# Altium PCB PCB1.PcbDoc (part 2 of 4)
Units mm, origin at the board's own origin, x right, y up, seen from the top; angles counter-clockwise.
Board outline 152.65 x 113.28 mm, 2 copper layers (Top Layer, Bottom Layer); 145 components, 136 nets, 617 pads, 371 vias.
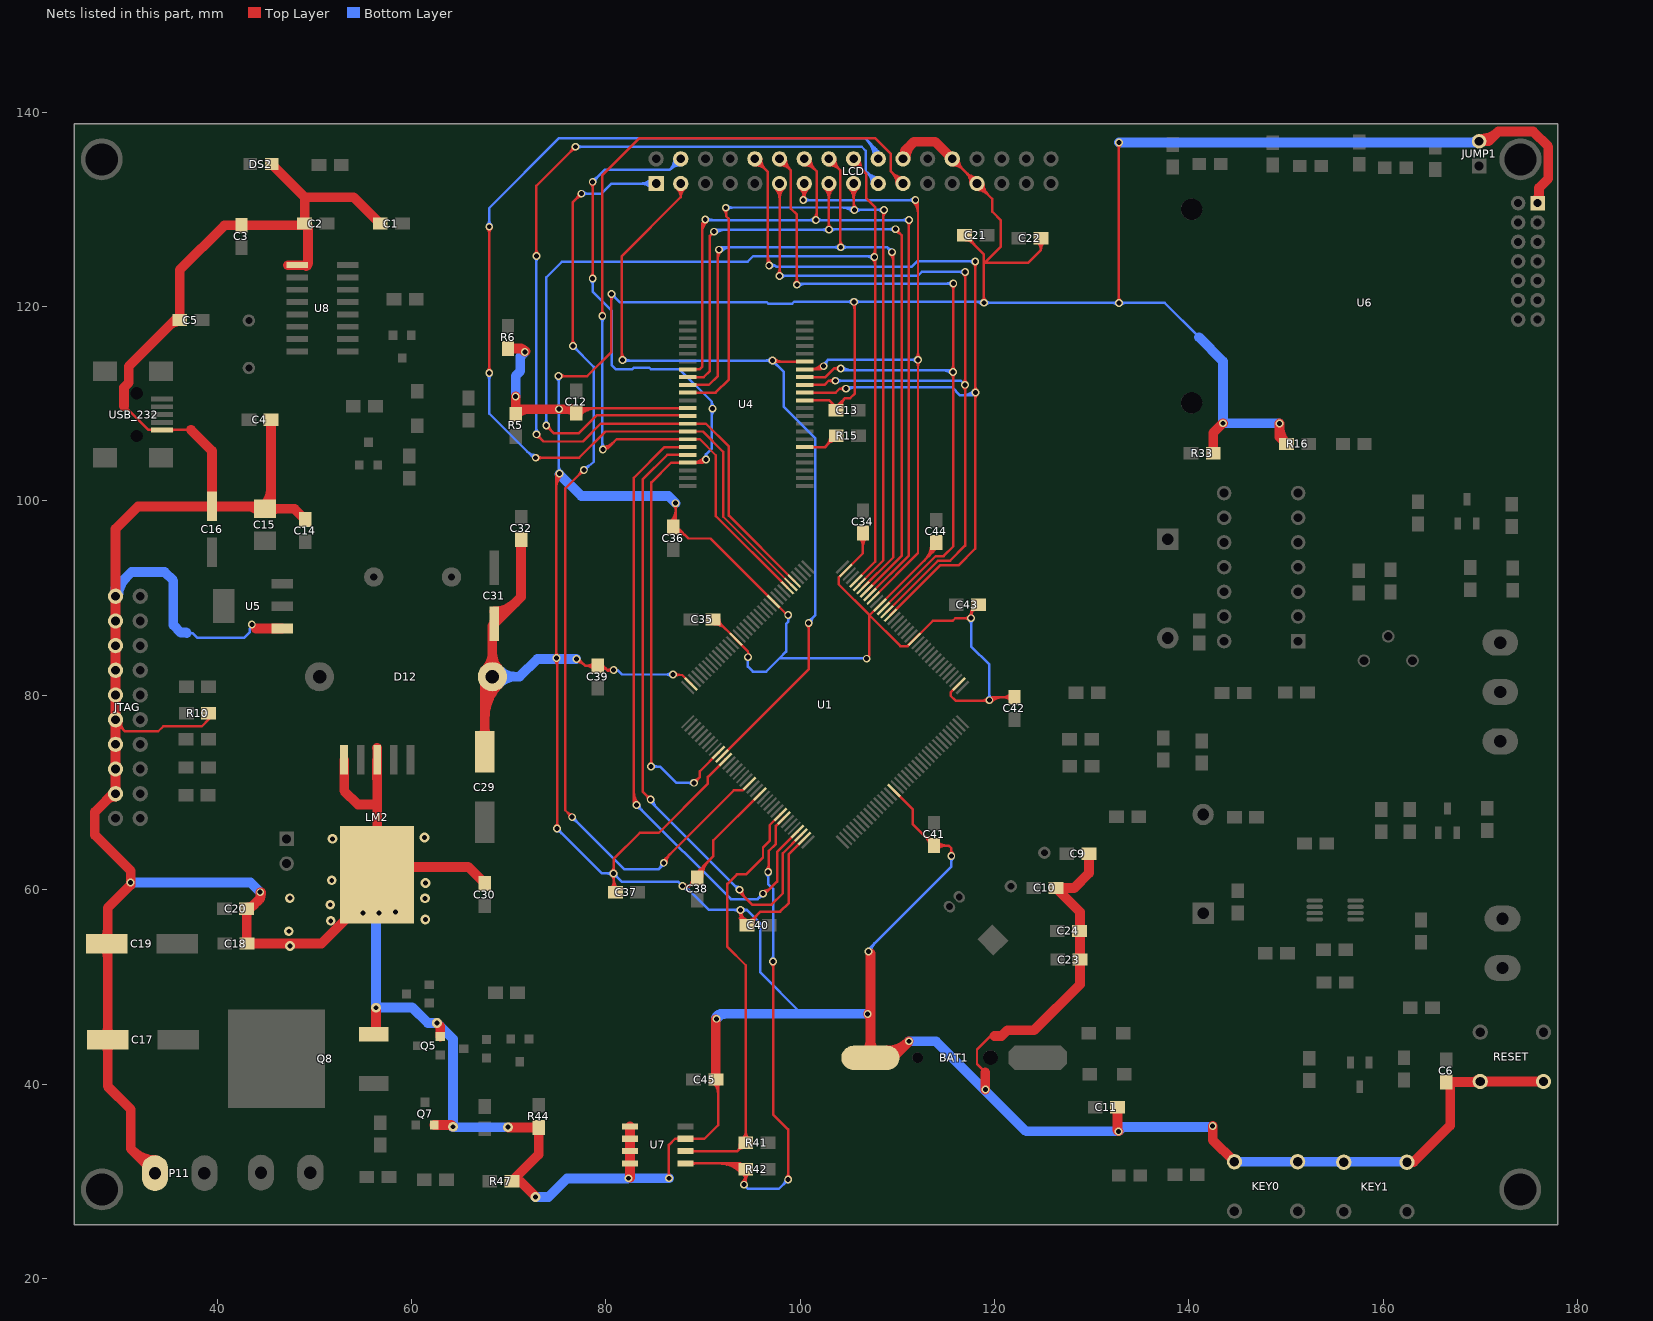
[diagram p2: the nets of this part, all layers, seen from the top]

## Via types
v1: diameter 0.8, hole 0.508, Top Layer to Bottom Layer, 296 vias
v2: diameter 1, hole 0.5, Top Layer to Bottom Layer, 75 vias

## Nets (pads, with @x,y where several pads share a name; then routed paths per layer and width w, separated by ;. In a path a pad name is that pad's centre, name@x,y a point inside that pad or via, vN(x,y) a via of type N, cw(c..) or ccw(c..) an arc to the next point about the centre after c; other vN are vias at no path point) (continued)
"FSMC D4": LCD.10 U1.58 U4.13 | length 107.1
  Top Layer w0.254: LCD.10@95.326,134.544 cw(c95.326,132.949) 96.454,134.077 cw(c97.581,135.204) LCD.10@95.987,135.204 ; LCD.10@95.326,134.798 cw(c95.326,133.817) 96.02,134.51 cw(c96.714,135.204) LCD.10@95.733,135.204 ; LCD.10@95.326,135.204 96.672,133.858 96.672,124.358 v1(96.799,124.231) ; 96.672,125.197 ccw(c97.765,125.197) v1@96.992,124.424 ; U4.13@100.441,111.149 103.656,111.149 104.064,111.557 ; v1@104.501,111.369 ccw(c104.064,110.955) 104.064,111.557 ; v1@104.501,111.745 cw(c104.064,112.159) 104.064,111.557 ; v1(104.699,111.557) 104.064,111.557 ; U1.58@109.273,88.25 114.394,93.37 116.281,93.37 118.008,95.098 v1(118.008,124.638) ; v1@117.815,124.445 cw(c117.349,123.979) 118.008,123.979 cw(c118.667,123.979) v1@118.201,124.445 ; v1@117.841,110.983 cw(c117.436,110.578) 118.008,110.578 ; v1@117.841,111.369 ccw(c117.436,111.774) 118.008,111.774 ; 118.008,110.455 cw(c118.754,110.455) v1@118.227,110.983 ; 118.008,111.896 ccw(c118.754,111.896) v1@118.227,111.369
  Bottom Layer w0.254: v1(96.799,124.231) 97.409,124.231 ; v1@97.003,124.05 cw(c97.409,123.687) 97.409,124.231 ; v1@97.003,124.413 ccw(c97.409,124.775) 97.409,124.231 ; v1(104.699,111.557) 104.851,111.709 115.595,111.709 116.434,110.871 117.729,110.871 v1(118.034,111.176) v1@118.007,111.149 ; v1@104.712,111.543 cw(c105.113,111.143) 105.113,111.709 ; v1@104.892,111.364 cw(c105.726,110.53) 105.726,111.709 ; 116.639,110.871 ccw(c116.639,112.571) v1@117.841,111.369 ; 117.227,124.689 cw(c117.227,123.856) v1@117.815,124.445 ; 117.252,110.871 ccw(c117.252,111.958) v1@118.02,111.189 ; 117.472,124.689 ccw(c117.472,125.174) v1@117.815,124.831 ; v1(118.008,124.638) 117.958,124.689 112.065,124.689 111.455,124.079 97.561,124.079 97.409,124.231
"FSMC D5": LCD.11 U1.59 U4.14 | length 96.9
  Top Layer w0.254: LCD.11@97.399,132.197 cw(c96.272,131.07) 97.866,131.07 cw(c99.461,131.07) LCD.11@98.333,132.197 ; LCD.11@97.579,132.377 cw(c96.885,131.683) 97.866,131.683 cw(c98.847,131.683) LCD.11@98.154,132.377 ; v1@97.673,123.358 ccw(c97.207,123.824) 97.866,123.824 ccw(c98.525,123.824) v1@98.059,123.358 ; v1@97.866,123.215 LCD.11@97.866,132.664 ; U4.14@100.441,111.949 102.504,111.949 102.925,112.37 v1(103.607,112.37) ; v1@103.414,112.177 ccw(c102.948,111.711) 102.948,112.37 ccw(c102.948,113.029) v1@103.414,112.563 ; U1.59@108.92,88.604 114.169,93.853 115.418,93.853 116.967,95.402 v1(116.967,123.571) ; v1@116.759,111.756 cw(c116.258,111.254) 116.967,111.254 ; v1@116.759,112.142 ccw(c116.258,112.643) 116.967,112.643 ; v1@116.774,123.378 cw(c116.308,122.912) 116.967,122.912 cw(c117.626,122.912) v1@117.16,123.378 ; 116.967,111.325 cw(c117.576,111.325) v1@117.145,111.756 ; 116.967,112.573 ccw(c117.576,112.573) v1@117.145,112.142
  Bottom Layer w0.254: v1(97.866,123.165) 112.09,123.165 112.497,123.571 v1(116.967,123.571) ; v1@98.059,122.972 cw(c98.525,122.506) 98.525,123.165 cw(c98.525,123.824) v1@98.059,123.358 ; v1(103.607,112.37) 116.531,112.37 v1(116.952,111.949) ; v1@103.8,112.177 cw(c104.266,111.711) 104.266,112.37 cw(c104.266,113.029) v1@103.8,112.563 ; v1@116.774,123.378 ccw(c116.308,122.912) 116.308,123.571 ccw(c116.308,124.23) v1@116.774,123.764
"FSMC D6": LCD.12 U1.60 U4.15 | length 96.6
  Top Layer w0.254: LCD.12@97.866,134.544 cw(c97.866,132.949) 98.994,134.077 cw(c100.121,135.204) LCD.12@98.527,135.204 ; LCD.12@97.866,134.798 cw(c97.866,133.817) 98.56,134.51 cw(c99.254,135.204) LCD.12@98.273,135.204 ; LCD.12@97.866,135.204 99.035,134.036 99.035,130.073 99.644,129.464 v1(99.644,122.25) ; v1@99.451,122.443 ccw(c98.985,122.909) 99.644,122.909 ccw(c100.303,122.909) v1@99.837,122.443 ; U4.15@100.441,112.749 102.589,112.749 103.48,113.64 v1(104.165,113.64) ; v1@103.972,113.447 ccw(c103.506,112.981) 103.506,113.64 ccw(c103.506,114.299) v1@103.972,113.833 ; U1.60@108.566,88.957 113.945,94.336 114.757,94.336 115.748,95.326 v1@115.748,122.352 ; v1@115.529,113.091 cw(c115.002,112.564) 115.748,112.564 ; v1@115.529,113.477 ccw(c115.002,114.004) 115.748,114.004 ; v1@115.555,122.184 cw(c115.089,121.718) 115.748,121.718 cw(c116.407,121.718) v1@115.941,122.184 ; 115.748,112.686 cw(c116.32,112.686) v1@115.915,113.091 ; 115.748,113.882 ccw(c116.32,113.882) v1@115.915,113.477
  Bottom Layer w0.254: v1@99.644,122.377 v1(115.748,122.377) ; v1@99.837,122.057 cw(c100.61,121.285) 100.61,122.377 ; v1(104.165,113.64) 104.343,113.462 115.545,113.462 v1(115.722,113.284) v1@115.748,113.309 ; v1@104.179,113.653 ccw(c104.641,114.115) 104.641,113.462 ; v1@104.358,113.833 ccw(c105.254,114.728) 105.254,113.462 ; 114.634,113.462 cw(c114.634,112.196) v1@115.529,113.091 ; 115.247,113.462 cw(c115.247,112.809) v1@115.709,113.271 ; v1@115.555,122.184 ccw(c115.089,121.718) 115.089,122.377 ccw(c115.089,123.036) v1@115.555,122.57
"FSMC D7": LCD.13 U1.63 U4.16 | length 83.4
  Top Layer w0.254: LCD.13@99.939,132.197 cw(c98.812,131.07) 100.406,131.07 cw(c102.001,131.07) LCD.13@100.873,132.197 ; v1@100.112,131.155 ccw(c99.4,131.867) 100.406,131.867 ; LCD.13@100.119,132.377 cw(c99.425,131.683) 100.406,131.683 cw(c101.387,131.683) LCD.13@100.694,132.377 ; v1@100.406,131.064 LCD.13@100.406,132.664 ; 100.406,131.376 ccw(c100.718,131.376) v1@100.498,131.155 ; U4.16@100.441,113.549 102.093,113.549 102.387,113.843 102.387,114.071 102.413,114.046 v1(102.413,113.868) ; U4.16@100.982,113.549 ccw(c100.982,115.299) v1@102.22,114.061 ; 101.595,113.549 ccw(c101.595,114.686) v1@102.399,113.882 ; U1.63@107.506,90.018 112.116,94.628 v1@112.116,130.683 ; v1@111.643,130.769 cw(c110.503,129.629) 112.116,129.629 ; v1@111.823,130.949 cw(c111.116,130.242) 112.116,130.242 ; v1@111.923,114.336 cw(c111.457,113.87) 112.116,113.87 cw(c112.775,113.87) v1@112.309,114.336 ; v1@111.923,114.722 ccw(c111.457,115.188) 112.116,115.188 ccw(c112.775,115.188) v1@112.309,114.722
  Bottom Layer w0.254: v1(100.305,130.962) v1(111.836,130.962) ; v1@100.498,130.769 cw(c100.964,130.303) 100.964,130.962 cw(c100.964,131.621) v1@100.498,131.155 ; v1@102.387,114.071 102.832,114.516 ; v1@102.677,113.938 cw(c103.257,114.092) 102.832,114.516 ; 111.427,114.516 ccw(c111.427,115.217) v1@111.923,114.722 ; 111.486,114.516 cw(c111.486,113.899) v1@111.923,114.336 ; v1@111.643,130.769 ccw(c111.177,130.303) 111.177,130.962 ccw(c111.177,131.621) v1@111.643,131.155 ; v1@112.116,114.275 111.874,114.516 102.832,114.516
  other v1: 112.116,114.529
"FSMC D8": LCD.14 U1.64 U4.29 | length 97.5
  Top Layer w0.254: U4.29@88.441,113.549 89.647,113.549 89.891,113.792 89.891,128.575 90.119,128.803 v1@90.373,128.803 ; 89.891,127.5 cw(c91.677,127.5) v1@90.414,128.763 ; 89.891,128.113 cw(c91.064,128.113) v1@90.234,128.942 ; LCD.14@100.406,134.544 cw(c100.406,132.949) 101.534,134.077 cw(c102.661,135.204) LCD.14@101.067,135.204 ; LCD.14@100.406,134.798 cw(c100.406,133.817) 101.1,134.51 cw(c101.794,135.204) LCD.14@100.813,135.204 ; LCD.14@100.406,135.204 101.702,133.909 101.702,129.007 v1(101.6,128.905) ; v1@101.407,129.098 ccw(c100.696,129.809) 101.702,129.809 ; 101.702,129.319 ccw(c102.014,129.319) v1@101.793,129.098 ; U1.64@107.152,90.371 111.176,94.395 v1(111.176,128.905) ; v1@110.983,128.712 cw(c110.517,128.246) 111.176,128.246 cw(c111.835,128.246) v1@111.369,128.712
  Bottom Layer w0.254: v1@90.221,128.905 v1(101.6,128.905) v1(111.176,128.905) ; v1@90.414,128.763 cw(c90.757,128.419) 90.757,128.905 ; v1@90.414,129.149 ccw(c91.003,129.738) 91.003,128.905 ; v1@101.407,128.712 ccw(c100.941,128.246) 100.941,128.905 ccw(c100.941,129.564) v1@101.407,129.098 ; v1@101.793,128.712 cw(c102.259,128.246) 102.259,128.905 cw(c102.259,129.564) v1@101.793,129.098 ; v1@110.983,128.712 ccw(c110.517,128.246) 110.517,128.905 ccw(c110.517,129.564) v1@110.983,129.098
  other v1: 90.221,128.956
"FSMC D9": LCD.15 U1.65 U4.30 | length 90.6
  Top Layer w0.254: U4.30@88.441,112.749 90.066,112.749 90.703,113.386 90.703,127.279 v1(91.135,127.711) ; LCD.15@102.479,132.197 cw(c101.352,131.07) 102.946,131.07 cw(c104.541,131.07) LCD.15@103.413,132.197 ; LCD.15@102.659,132.377 cw(c101.965,131.683) 102.946,131.683 cw(c103.927,131.683) LCD.15@103.234,132.377 ; v1@102.753,128.107 ccw(c102.287,128.573) 102.946,128.573 ccw(c103.605,128.573) v1@103.139,128.107 ; v1(102.946,127.914) LCD.15@102.946,132.664 ; U1.65@106.799,90.725 110.424,94.351 110.424,127.345 v1(109.804,127.965) ; v1@109.804,127.692 cw(c109.804,127.033) 110.27,127.499 cw(c110.736,127.965) v1@110.077,127.965
  Bottom Layer w0.254: v1(91.135,127.711) 91.338,127.914 v1(102.946,127.914) 103.16,127.701 103.424,127.965 v1(109.804,127.965) ; v1@91.149,127.698 cw(c91.672,127.175) 91.672,127.914 ; v1@91.328,127.518 cw(c92.285,126.562) 92.285,127.914 ; v1@102.753,127.721 ccw(c102.287,127.255) 102.287,127.914 ccw(c102.287,128.573) v1@102.753,128.107 ; v1@103.139,127.721 cw(c103.728,127.133) 103.728,127.965 ; v1@103.139,128.107 ccw(c103.483,128.451) 103.483,127.965 ; v1@109.611,127.772 ccw(c109.145,127.306) 109.145,127.965 ccw(c109.145,128.624) v1@109.611,128.158
"FSMC D10": LCD.16 U1.66 U4.31 | length 91.3
  Top Layer w0.254: U4.31@88.441,111.949 90.587,111.949 91.516,112.878 v1@91.516,125.603 ; 91.516,124.891 cw(c92.609,124.891) v1@91.836,125.664 ; LCD.16@102.946,134.544 cw(c102.946,132.949) 104.074,134.077 cw(c105.201,135.204) LCD.16@103.607,135.204 ; LCD.16@102.946,134.798 cw(c102.946,133.817) 103.64,134.51 cw(c104.334,135.204) LCD.16@103.353,135.204 ; LCD.16@102.946,135.204 104.115,134.036 v1@104.115,126.289 ; v1@103.972,126.304 ccw(c103.629,126.647) 104.115,126.647 ; 104.115,126.893 ccw(c104.947,126.893) v1@104.358,126.304 ; U1.66@106.445,91.079 109.576,94.209 v1@109.576,125.603 ; v1@109.256,125.41 cw(c108.483,124.637) 109.576,124.637
  Bottom Layer w0.254: v1(91.643,125.857) 91.669,125.857 91.923,126.111 v1(104.165,126.111) 108.941,126.111 v1(109.449,125.603) ; v1@91.657,125.844 cw(c92.302,125.198) 92.302,126.111 ; v1@91.836,125.664 cw(c92.915,124.585) 92.915,126.111 ; v1@103.972,125.918 ccw(c103.506,125.452) 103.506,126.111 ccw(c103.506,126.77) v1@103.972,126.304 ; v1@104.358,125.918 cw(c104.824,125.452) 104.824,126.111 cw(c104.824,126.77) v1@104.358,126.304 ; v1@109.176,125.603 ccw(c108.517,125.603) 108.983,126.069 ccw(c109.449,126.535) v1@109.449,125.876
"FSMC D11": LCD.17 U1.67 U4.32 | length 93.7
  Top Layer w0.254: U4.32@88.441,111.149 91.286,111.149 92.653,112.516 92.653,129.013 92.38,129.286 92.38,130.226 v1(92.329,130.175) ; v1@92.136,129.982 cw(c91.547,129.393) 92.38,129.393 ; 92.38,129.639 cw(c92.865,129.639) v1@92.522,129.982 ; LCD.17@105.019,132.197 cw(c103.892,131.07) 105.486,131.07 cw(c107.081,131.07) LCD.17@105.953,132.197 ; LCD.17@105.199,132.377 cw(c104.505,131.683) 105.486,131.683 cw(c106.467,131.683) LCD.17@105.774,132.377 ; v1@105.369,130.139 ccw(c105.087,130.422) 105.486,130.422 ; v1@105.486,130.023 LCD.17@105.486,132.664 ; 105.486,130.789 ccw(c106.405,130.789) v1@105.755,130.139 ; U1.67@106.091,91.432 108.534,93.875 108.534,129.87 v1(108.61,129.946) v1@108.763,130.099 ; v1@108.417,129.753 cw(c108.135,129.471) 108.534,129.471 ; 108.534,129.103 cw(c109.453,129.103) v1@108.803,129.753
  Bottom Layer w0.254: v1(92.329,130.175) 92.608,130.175 92.634,130.2 105.308,130.2 v1(105.562,129.946) 105.588,129.972 v1(108.61,129.946) ; v1@92.522,129.982 cw(c93.049,129.455) 93.049,130.2 ; v1@92.522,130.368 ccw(c92.927,130.773) 92.927,130.2 ; 104.29,130.2 cw(c104.29,128.674) v1@105.369,129.753 ; 104.903,130.2 cw(c104.903,129.287) v1@105.549,129.933 ; v1@105.754,129.752 cw(c106.277,129.219) 106.284,129.966 ; v1@105.757,130.138 ccw(c106.165,130.539) 106.16,129.967 ; v1@108.416,129.755 ccw(c107.946,129.293) 107.951,129.952 ccw(c107.957,130.611) v1@108.419,130.141
"FSMC D12": LCD.18 U1.68 U4.35 | length 119.8
  Top Layer w0.254: v1@73.863,107.499 cw(c73.863,106.84) 74.329,107.306 cw(c74.795,107.772) v1@74.136,107.772 ; v1(73.863,107.772) 74.676,106.959 77.191,106.959 79.064,108.833 88.357,108.833 U4.35@88.441,108.749 ; 87.362,108.833 cw(c87.362,108.37) U4.35@87.689,108.697 ; LCD.18@105.486,134.544 cw(c105.486,133.563) 106.18,134.256 ; LCD.18@105.486,135.204 105.486,134.95 106.807,133.629 106.807,131.14 107.696,130.251 107.696,93.744 U1.68@105.738,91.786 ; LCD.18@105.892,135.18 ccw(c107.225,135.1) 106.281,134.156 ; LCD.18@106.145,135.165 ccw(c107.978,135.055) 106.68,133.756 ; v1@107.427,124.902 cw(c106.777,124.252) 107.696,124.252 ; v1@107.427,125.288 ccw(c106.777,125.938) 107.696,125.938 ; 107.696,124.62 cw(c108.095,124.62) v1@107.813,124.902 ; 107.696,125.57 ccw(c108.095,125.57) v1@107.813,125.288
  Bottom Layer w0.254: v1@73.67,107.965 ccw(c73.204,108.431) 73.863,108.431 ccw(c74.522,108.431) v1@74.056,107.965 ; v1(73.863,107.772) 73.863,123.012 75.463,124.612 94.59,124.612 95.155,125.178 107.537,125.178 v1(107.62,125.095) ; 106.761,125.178 cw(c106.761,124.236) v1@107.427,124.902 ; 107.161,125.178 ccw(c107.161,125.554) v1@107.427,125.288
"FSMC D13": LCD.19 U1.77 U4.36 | length 113.9
  Top Layer w0.254: v1@72.654,125.415 ccw(c72.188,125.881) 72.847,125.881 ccw(c73.506,125.881) v1@73.04,125.415 ; v1@72.847,106.585 cw(c72.847,105.926) 73.313,106.392 cw(c73.779,106.858) v1@73.12,106.858 ; v1(72.847,106.858) 73.584,106.121 77.622,106.121 79.45,107.949 U4.36@88.441,107.949 90.298,107.949 92.659,105.588 92.659,98.5 U1.77@99.374,91.786 ; v1(72.847,125.222) 72.847,132.436 v1(76.86,136.449) ; v1@76.587,136.449 cw(c75.928,136.449) 76.394,135.983 cw(c76.86,135.517) v1@76.86,136.176
  Bottom Layer w0.254: v1@72.654,107.051 ccw(c72.188,107.517) 72.847,107.517 ccw(c73.506,107.517) v1@73.04,107.051 ; v1@72.654,125.029 cw(c72.188,124.563) 72.847,124.563 cw(c73.506,124.563) v1@73.04,125.029 ; v1(72.847,106.858) v1(72.847,125.222) ; v1(76.86,136.449) 106.324,136.449 106.731,136.042 106.731,133.96 LCD.19@108.026,132.664 ; v1@77.053,136.256 cw(c77.519,135.79) 77.519,136.449 cw(c77.519,137.108) v1@77.053,136.642 ; LCD.19@107.366,132.664 ccw(c105.771,132.664) 106.899,133.792 ccw(c108.026,134.919) LCD.19@108.026,133.325 ; LCD.19@107.62,132.664 ccw(c106.639,132.664) 107.332,133.358 ccw(c108.026,134.052) LCD.19@108.026,133.071
"FSMC D14": LCD.20 U1.78 U4.37 | length 121.9
  Top Layer w0.254: v1@67.803,113.35 ccw(c67.337,113.816) 67.996,113.816 ccw(c68.655,113.816) v1@68.189,113.35 ; v1@67.803,128.026 cw(c67.337,127.56) 67.996,127.56 cw(c68.655,127.56) v1@68.189,128.026 ; v1(67.996,113.157) v1(67.996,128.219) ; v1(72.771,104.445) 77.241,104.445 79.945,107.149 U4.37@88.441,107.149 ; v1@72.964,104.252 cw(c73.43,103.786) 73.43,104.445 cw(c73.43,105.104) v1@72.964,104.638 ; U4.37@88.443,107.137 U4.37@88.441,107.149 ; U1.78@99.02,91.432 92.075,98.378 92.075,105.054 89.981,107.149 U4.37@88.441,107.149
  Bottom Layer w0.254: v1@67.803,112.964 cw(c67.337,112.498) 67.996,112.498 cw(c68.655,112.498) v1@68.189,112.964 ; v1@67.803,128.412 ccw(c67.337,128.878) 67.996,128.878 ccw(c68.655,128.878) v1@68.189,128.412 ; v1(67.996,113.157) 67.996,108.991 72.492,104.496 v1@72.974,104.496 ; v1(67.996,128.219) 67.996,130.15 75.184,137.338 106.655,137.338 108.026,135.966 LCD.20@108.026,135.204 ; 71.915,105.072 ccw(c72.771,105.929) v1@72.771,104.718 ; 72.348,104.639 ccw(c72.771,105.062) v1@72.771,104.464 ; 106.794,137.199 cw(c104.799,135.204) LCD.20@107.62,135.204 ; 107.227,136.765 cw(c105.666,135.204) LCD.20@107.874,135.204 ; 107.661,136.332 cw(c106.533,135.204) LCD.20@108.128,135.204
"FSMC D15": LCD.21 U1.79 U4.38 | length 102.3
  Top Layer w0.254: v1@79.436,119.217 ccw(c78.97,119.683) 79.629,119.683 ccw(c80.288,119.683) v1@79.822,119.217 ; v1(79.629,119.024) 79.629,133.528 83.439,137.338 107.696,137.338 109.322,135.712 109.322,133.909 LCD.21@110.566,132.664 ; v1@79.654,105.41 80.162,105.41 81.101,106.349 U4.38@88.441,106.349 89.663,106.349 91.303,104.709 91.303,98.442 U1.79@98.667,91.079 ; v1@79.68,105.327 ccw(c79.68,106.293) 80.363,105.61 ; v1@79.68,105.581 ccw(c79.68,107.16) 80.796,106.044 ; LCD.21@109.906,132.664 ccw(c108.311,132.664) 109.439,133.792 ccw(c110.566,134.919) LCD.21@110.566,133.325 ; LCD.21@110.16,132.664 ccw(c109.179,132.664) 109.872,133.358 ccw(c110.566,134.052) LCD.21@110.566,133.071
  Bottom Layer w0.254: v1@79.436,118.831 cw(c78.97,118.365) 79.629,118.365 cw(c80.288,118.365) v1@79.822,118.831 ; v1@79.487,105.501 ccw(c79.143,105.845) 79.629,105.845 ; v1@79.629,105.308 v1(79.629,119.024) ; 79.629,106.09 ccw(c80.462,106.09) v1@79.873,105.501
  other v1: 79.68,105.308
"FSMC NBL0": U1.141 U4.39 | length 71.4
  Top Layer w0.254: 82.88,69.427 ccw(c83.88,69.427) v1@83.173,68.72 ; 82.88,70.041 ccw(c84.493,70.041) v1@83.353,68.9 ; v1(83.16,68.707) 83.261,68.809 83.058,68.809 82.88,68.986 82.88,102.387 86.041,105.549 U4.39@88.441,105.549 ; v1@96.164,59.607 ccw(c96.164,60.144) 96.544,59.765 ; v1@96.164,59.861 ccw(c96.164,61.011) 96.977,60.198 ; v1@96.393,59.614 97.612,60.833 97.612,63.861 U1.141@99.728,65.976
  Bottom Layer w0.254: v1@83.109,68.783 92.862,59.03 95.606,59.03 v1(96.164,59.588) ; v1@83.16,68.434 cw(c83.16,67.714) 83.669,68.223 ; v1@83.433,68.707 ccw(c84.03,68.707) 83.608,68.284 ; v1@95.891,59.588 cw(c95.232,59.588) 95.698,59.122 cw(c96.164,58.656) v1@96.164,59.315
"FSMC NBL1": U1.142 U4.40 | length 69.4
  Top Layer w0.254: v1@84.334,69.266 ccw(c83.675,69.266) 84.141,69.732 ccw(c84.607,70.198) v1@84.607,69.539 ; v1(84.607,69.266) 83.769,70.104 83.769,102.21 86.308,104.749 U4.40@88.441,104.749 ; v1(93.751,59.995) 93.751,59.84 93.714,59.803 95.047,58.471 97.053,58.471 98.196,59.614 98.196,63.738 U1.142@100.081,65.623 ; v1@93.77,59.995 ccw(c94.368,59.995) 93.945,59.572 ; v1@94.024,59.995 ccw(c95.235,59.995) 94.379,59.139
  Bottom Layer w0.254: v1(84.607,69.266) 84.709,68.961 v1@93.713,59.957 ; v1@84.626,69.266 ccw(c85.163,69.266) 84.784,68.886 ; v1@84.88,69.266 ccw(c86.03,69.266) 85.217,68.453 ; 93.155,60.515 ccw(c93.751,61.111) v1@93.751,60.268 ; 93.339,60.331 cw(c93.003,59.995) v1@93.478,59.995
"FSMC NE3": R15.1 U4.6 | length 6.4
  Top Layer w0.254: U4.6@100.441,105.549 102.553,105.549 R15.1@103.708,106.704 ; 102.624,105.62 ccw(c101.54,106.704) R15.1@103.073,106.704 ; 102.931,105.926 cw(c103.581,105.276) R15.1@103.581,106.196 ; 103.058,106.053 ccw(c102.407,106.704) R15.1@103.327,106.704
"FSMC NE4": LCD.1 U1.127 | length 114.3
  Top Layer w0.254: v1@76.257,67.462 ccw(c75.598,67.462) 76.064,67.928 ccw(c76.53,68.394) v1@76.53,67.735 ; v1@76.413,116.144 ccw(c75.947,116.61) 76.606,116.61 ccw(c77.265,116.61) v1@76.799,116.144 ; v1(76.53,67.462) 75.819,68.174 75.819,101.295 v1(77.724,103.2) ; v1(76.606,115.951) 76.606,130.759 v1(77.47,131.623) ; v1@77.197,131.623 cw(c76.538,131.623) 77.004,131.157 cw(c77.47,130.691) v1@77.47,131.35 ; v1@77.451,103.2 cw(c76.792,103.2) 77.258,102.734 cw(c77.724,102.268) v1@77.724,102.927 ; v1(85.954,62.763) 85.954,63.017 93.159,70.223 94.075,70.223 U1.127@94.778,70.926 ; v1@85.973,62.763 cw(c86.632,62.763) 86.166,63.229 ; v1@86.227,62.763 cw(c87.499,62.763) 86.599,63.663
  Bottom Layer w0.254: v1@76.53,67.189 cw(c76.53,66.53) 76.996,66.996 cw(c77.462,67.462) v1@76.803,67.462 ; v1@76.606,115.678 cw(c76.606,115.019) 77.072,115.485 cw(c77.538,115.951) v1@76.879,115.951 ; v1(76.606,115.951) 78.74,113.817 78.74,104.013 v1(77.724,103.2) ; v1@76.632,67.564 76.632,67.361 81.904,62.088 85.407,62.088 85.954,62.635 v1(85.954,62.763) ; v1(77.47,131.623) 79.553,131.623 80.594,132.664 LCD.1@85.166,132.664 ; v1@77.663,131.43 cw(c78.129,130.964) 78.129,131.623 cw(c78.129,132.282) v1@77.663,131.816 ; v1@77.754,103.472 ccw(c77.827,104.127) 78.239,103.612 ccw(c78.65,103.097) v1@77.995,103.17 ; LCD.1@84.699,132.197 ccw(c83.572,131.07) 83.572,132.664 ccw(c83.572,134.259) LCD.1@84.699,133.131 ; LCD.1@84.879,132.377 ccw(c84.185,131.683) 84.185,132.664 ccw(c84.185,133.645) LCD.1@84.879,132.952 ; 85.471,62.152 ccw(c84.953,62.67) v1@85.682,62.738 ; 85.706,62.388 cw(c85.954,62.141) v1@85.954,62.49
"FSMC NOE": LCD.4 U1.118 U4.41 | length 110.9
  Top Layer w0.254: v1@78.445,123.078 ccw(c77.979,123.544) 78.638,123.544 ccw(c79.297,123.544) v1@78.831,123.078 ; v1@78.445,132.649 cw(c77.979,132.183) 78.638,132.183 cw(c79.297,132.183) v1@78.831,132.649 ; v1(78.638,122.885) v1(78.638,132.842) ; v1@84.44,72.862 ccw(c83.851,73.451) 84.684,73.451 ; v1@84.684,72.669 84.684,101.905 86.727,103.949 U4.41@88.441,103.949 89.979,103.949 v1(90.297,104.267) ; 84.684,73.206 ccw(c85.169,73.206) v1@84.826,72.862 ; LCD.4@87.706,134.722 LCD.4@87.706,135.204 ; U4.41@88.869,103.949 ccw(c88.869,105.695) v1@90.104,104.46 ; v1(89.078,70.993) 89.662,71.577 89.662,72.174 U1.118@91.596,74.108 ; v1@89.078,71.266 ccw(c89.078,71.925) 89.544,71.459 ccw(c90.01,70.993) v1@89.351,70.993 ; 89.482,103.949 ccw(c89.482,105.082) v1@90.284,104.28
  Bottom Layer w0.254: v1@78.445,122.692 cw(c77.979,122.226) 78.638,122.226 cw(c79.297,122.226) v1@78.831,122.692 ; v1(78.638,122.885) 78.638,121.539 80.62,119.558 80.62,113.944 81.026,113.538 82.702,113.538 82.88,113.716 84.455,113.716 84.633,113.538 87.579,113.538 90.907,110.211 ; v1(78.638,132.842) 79.858,134.061 86.563,134.061 LCD.4@87.706,135.204 ; v1@78.638,133.115 ccw(c78.638,133.774) 79.104,133.308 ccw(c79.57,132.842) v1@78.911,132.842 ; v1(84.633,72.669) 85.573,72.669 87.249,70.993 v1(89.078,70.993) ; v1@84.826,72.476 cw(c85.292,72.01) 85.292,72.669 cw(c85.292,73.328) v1@84.826,72.862 ; LCD.4@87.046,135.204 cw(c85.451,135.204) 86.579,134.077 cw(c87.706,132.949) LCD.4@87.706,134.544 ; LCD.4@87.3,135.204 cw(c86.319,135.204) 87.012,134.51 cw(c87.706,133.817) LCD.4@87.706,134.798 ; v1@88.885,70.8 ccw(c88.419,70.334) 88.419,70.993 ccw(c88.419,71.652) v1@88.885,71.186 ; v1@90.137,104.488 ccw(c89.912,104.8) 90.297,104.8 ; v1(90.297,104.267) 90.297,104.8 ; v1@90.457,104.488 cw(c90.682,104.8) 90.297,104.8 ; v1@90.764,109.306 cw(c90.421,108.963) 90.907,108.963 ; v1@90.764,109.692 ccw(c90.421,110.036) 90.907,110.036 ; 90.907,108.718 cw(c91.739,108.718) v1@91.15,109.306 ; v1@91.137,109.705 cw(c91.576,110.211) 90.907,110.211 ; 90.297,104.8 90.907,105.41 90.907,110.211
  other v1: 90.957,109.499
"FSMC NWE": LCD.3 U1.119 U4.17 | length 96.2
  Top Layer w0.254: v1@81.519,114.696 ccw(c81.298,114.917) 81.61,114.917 ; 81.61,115.408 ccw(c82.616,115.408) v1@81.905,114.696 ; v1(81.712,114.503) 81.61,114.605 81.61,125.171 87.706,131.267 ; LCD.3@87.287,132.154 cw(c86.559,131.267) 87.706,131.267 ; LCD.3@87.448,132.35 cw(c87,131.805) 87.706,131.805 cw(c88.412,131.805) LCD.3@87.964,132.35 ; LCD.3@87.706,132.664 87.706,131.267 ; LCD.3@88.125,132.154 ccw(c88.853,131.267) 87.706,131.267 ; U1.119@91.949,73.754 100.863,82.668 v1(100.863,87.452) ; v1@97.233,114.349 U4.17@100.441,114.349 ; v1@97.323,114.259 cw(c97.538,114.044) 97.538,114.349 ; v1@97.323,114.645 ccw(c98.039,115.362) 98.039,114.349 ; v1@100.67,87.259 cw(c100.204,86.793) 100.863,86.793 cw(c101.522,86.793) v1@101.056,87.259
  Bottom Layer w0.254: v1@81.737,114.452 v1(97.13,114.452) 98.323,113.259 98.323,109.677 101.524,106.477 101.524,88.24 v1@100.863,87.579 ; v1@81.905,114.31 cw(c82.248,113.967) 82.248,114.452 ; v1@81.905,114.696 ccw(c82.494,115.285) 82.494,114.452 ; v1@96.937,114.259 ccw(c96.471,113.793) 96.471,114.452 ccw(c96.471,115.111) v1@96.937,114.645 ; v1@97.13,114.179 cw(c97.13,113.52) 97.596,113.986 cw(c98.062,114.452) v1@97.403,114.452 ; v1@100.863,87.725 ccw(c100.863,88.078) 101.113,87.828 ; v1@101.136,87.452 cw(c102.102,87.452) 101.419,88.135
GND: BAT1.2 C1.1 C2.1 C3.2 C4.1 C5.1 C6.2 C9.1 C10.1 C11.1 C12.1 C13.1 C14.1 C15.K C16.K C17.K C18.1 C19.K C20.1 C21.2 C22.2 C23.1 C24.1 C29.K C30.2 C31.K C32.2 C34.1 C35.1 C36.1 C37.1 C38.1 C39.1 C40.1 C41.1 C42.1 C43.1 C44.1 C45.1 D12.A DS2.K JTAG.4 JTAG.6 JTAG.8 JTAG.10 JTAG.12 JTAG.14 JTAG.16 JTAG.18 JTAG.20 JUMP1.2 KEY0.1 KEY1.1 LCD.22 LCD.26 LCD.27 LM2.3 LM2.5 P11.1 Q5.1 Q7.1 Q8.3 R5.2 R6.2 R10.1 R16.2 R33.2 R44.1 R47.1 RESET.2 U1.16 U1.38 U1.51 U1.61 U1.71 U1.83 U1.94 U1.107 U1.120 U1.130 U1.143 U4.12 U4.34 U5.1 U6.1 U7.1 U7.2 U7.3 U7.4 U7.7 U8.1 USB_232.5 | length 1281.8
  Top Layer w0.254: JTAG.10@29.54,76.835 cw(c29.54,75.793) 30.277,76.53 ; JTAG.10@29.54,77.267 30.505,76.302 33.934,76.302 34.442,76.81 38.405,76.81 39.116,77.521 ; JTAG.10@29.929,77.376 ccw(c30.56,77.181) 30.093,76.714 ; JTAG.10@30.171,77.301 ccw(c31.016,77.041) 30.391,76.416 ; 30.531,109.728 32.944,107.315 34.342,107.315 37.312,107.315 ; USB_232.5@33.355,107.228 ccw(c33.145,107.018) 33.145,107.315 ccw(c33.145,107.612) USB_232.5@33.355,107.402 ; USB_232.5@35.329,107.228 cw(c35.539,107.018) 35.539,107.315 cw(c35.539,107.612) USB_232.5@35.329,107.402 ; R10.1@39.003,77.662 cw(c38.971,77.521) 39.116,77.521 ; R10.1@39.116,78.157 39.116,77.521 ; R10.1@39.229,77.662 ccw(c39.261,77.521) 39.116,77.521 ; C15.K@44.907,99.187 C15.K@45.161,99.441 ; C15.K@44.907,99.441 C15.K@45.161,99.441 ; C15.K@45.542,99.822 C15.K@45.161,99.441 ; R6.2@69.925,115.697 R6.2@70.28,115.341 ; v1@74.712,83.652 cw(c74,82.941) 75.006,82.941 ; v1@74.712,84.038 ccw(c74.246,84.504) 74.905,84.504 ccw(c75.564,84.504) v1@75.098,84.038 ; v1@74.762,66.487 ccw(c74.174,67.076) 75.006,67.076 ; v1(74.905,83.845) v1@74.905,102.819 ; 74.905,101.363 cw(c76.691,101.363) v1@75.428,102.626 ; 74.905,101.976 cw(c76.078,101.976) v1@75.248,102.806 ; 74.905,102.589 cw(c75.465,102.589) v1@75.069,102.985 ; v1@75.006,66.345 v1@75.006,83.744 ; 75.006,66.83 ccw(c75.492,66.83) v1@75.148,66.487 ; 75.006,83.432 cw(c75.318,83.432) v1@75.098,83.652 ; v1(75.133,112.852) 78.08,112.852 80.569,115.341 v1(80.569,121.31) ; v1@75.326,112.659 cw(c75.792,112.193) 75.792,112.852 cw(c75.792,113.511) v1@75.326,113.045 ; C12.1@76.938,109.169 cw(c77.854,108.253) 77.854,109.549 ; v1@76.962,83.471 cw(c76.962,82.321) 77.775,83.134 ; v1@76.962,83.725 cw(c76.962,83.188) 77.341,83.568 ; C12.1@77.118,108.99 cw(c78.467,107.64) 78.467,109.549 ; v1@77.165,83.744 77.876,83.033 C39.1@79.145,83.033 79.704,83.033 80.135,82.601 v1(80.797,82.601) ; C12.1@77.297,108.81 cw(c79.081,107.027) 79.081,109.549 ; C12.1@77.445,109.549 U4.34@88.441,109.549 ; C39.1@78.786,82.673 ccw(c77.918,81.806) 77.918,83.033 ccw(c77.918,84.259) C39.1@78.786,83.392 ; C39.1@79.145,82.906 cw(c79.459,82.252) 79.971,82.765 ; C39.1@79.255,82.677 cw(c79.623,81.91) 80.225,82.511 ; v1@80.376,121.117 cw(c79.91,120.651) 80.569,120.651 cw(c81.228,120.651) v1@80.762,121.117 ; C37.1@80.489,60.098 ccw(c79.744,60.843) 80.797,60.843 ; v1@80.579,61.478 cw(c80.052,60.951) 80.797,60.951 ; v1@80.579,61.864 ccw(c80.052,62.392) 80.797,62.392 ; v1@80.604,82.408 ccw(c80.138,81.942) 80.138,82.601 ccw(c80.138,83.26) v1@80.604,82.794 ; 80.797,60.475 ccw(c81.584,60.475) C37.1@81.028,59.919 ; 80.797,61.073 cw(c81.37,61.073) v1@80.965,61.478 ; 80.797,61.088 ccw(c82.197,61.088) C37.1@81.207,60.098 ; 80.797,62.269 ccw(c81.37,62.269) v1@80.965,61.864 ; C37.1@80.975,59.739 80.797,59.917 80.797,63.17 83.49,65.862 85.446,65.862 90.5,70.917 90.5,71.598 U1.120@92.303,73.401 ; v1@86.294,30.394 ccw(c85.828,30.86) 86.487,30.86 ccw(c87.146,30.86) v1@86.68,30.394 ; v1@86.487,30.226 86.487,33.731 87.122,34.366 U7.7@88.174,34.366 90.145,34.366 91.542,35.763 91.542,40.235 C45.1@91.313,40.464 C45.1@91.389,40.54 ; C36.1@86.583,97.794 ccw(c85.16,99.217) 87.173,99.217 ; C36.1@86.763,97.614 ccw(c85.774,98.603) 87.173,98.603 ; C36.1@86.943,96.926 cw(c86.943,95.083) 88.246,96.386 ; C36.1@86.943,97.18 cw(c86.943,95.95) 87.813,96.82 ; v1@86.944,82.22 87.071,82.093 87.854,82.093 U1.107@88.767,81.179 ; v1@86.98,99.578 cw(c86.514,99.112) 87.173,99.112 cw(c87.832,99.112) v1@87.366,99.578 ; v1@87.086,81.951 cw(c87.43,81.607) 87.43,82.093 ; v1@87.086,82.337 ccw(c87.675,82.925) 87.675,82.093 ; C36.1@87.097,96.979 cw(c87.373,96.619) 87.693,96.939 ; C36.1@87.173,97.307 v1(87.173,99.771) ; 87.173,98.105 ccw(c87.613,98.105) C36.1@87.302,97.794 ; C36.1@87.251,96.777 cw(c87.55,96.386) 87.898,96.734 ; U7.7@87.531,34.231 ccw(c87.206,33.906) 87.206,34.366 ccw(c87.206,34.826) U7.7@87.531,34.501 ; 87.644,96.989 88.494,96.139 90.778,96.139 97.253,89.664 97.254,89.664 98.45,88.468 98.552,88.468 v1(98.755,88.265) v1@98.654,88.265 ; v1(87.884,60.376) 88.568,60.376 C38.1@89.406,61.214 ; v1@88.077,60.183 cw(c88.543,59.717) 88.543,60.376 cw(c88.543,61.035) v1@88.077,60.569 ; 88.505,60.312 cw(c89.188,59.629) C38.1@89.331,60.585 ; 88.629,60.437 ccw(c87.979,61.087) C38.1@88.898,61.087 ; U7.7@88.817,34.231 cw(c89.142,33.906) 89.142,34.366 cw(c89.142,34.826) U7.7@88.817,34.501 ; C38.1@88.861,60.668 cw(c89.281,60.249) C38.1@89.369,60.836 ; C38.1@88.898,60.706 C38.1@89.406,61.214 ; C38.1@89.406,61.341 cw(c90.506,61.341) 89.729,62.119 ; C38.1@89.66,61.341 cw(c91.373,61.341) 90.162,62.552 ; C38.1@89.914,61.341 cw(c92.241,61.341) 90.596,62.986 ; C35.1@90.549,87.376 91.763,87.376 94.615,84.524 ccw(c95.143,84.524) v1@94.795,84.127 ; C45.1@91.081,40.105 cw(c89.968,38.992) 91.542,38.992 ; C35.1@91.161,87.301 cw(c91.161,85.667) 92.316,86.823 ; C35.1@91.161,87.555 cw(c91.161,86.535) 91.882,87.256 ; C45.1@91.26,40.284 cw(c90.582,39.605) 91.542,39.605 ; 91.542,39.483 cw(c92.421,39.483) C45.1@91.799,40.105 ; C35.1@91.669,87.809 ccw(c92.487,87.809) 91.908,87.23 ; v1@93.66,57.719 cw(c93.194,57.253) 93.853,57.253 cw(c94.512,57.253) v1@94.046,57.719 ; 93.853,57.143 ccw(c94.731,57.143) C40.1@94.386,56.336 ; v1@93.853,57.527 ccw(c94.895,57.527) C40.1@94.486,56.569 ; C40.1@93.91,56.511 ccw(c93.422,56.691) 93.79,57.059 ccw(c94.316,57.585) C40.1@94.358,56.843 ; C40.1@94.586,56.803 cw(c95.059,57.912) v1(93.853,57.912) 93.853,56.996 C40.1@94.513,56.336 95.912,57.734 97.917,57.734 98.831,58.649 98.831,63.666 U1.143@100.435,65.269 ; C40.1@94.64,56.844 ccw(c94.64,57.763) 95.291,57.113 ; C40.1@94.894,56.336 cw(c95.814,56.336) 95.164,56.986 ; C40.1@95.148,56.336 cw(c96.681,56.336) 95.597,57.42 ; U1.130@95.838,69.865 91.059,65.086 91.059,63.449 89.406,61.797 C38.1@89.406,61.214 ; U4.12@100.441,110.349 103.01,110.349 C13.1@103.683,109.676 ; 103.088,110.271 cw(c102.469,109.652) C13.1@103.311,109.414 ; C13.1@103.394,109.964 cw(c102.947,109.517) C13.1@103.556,109.345 ; C13.1@103.898,109.46 C13.1@103.683,109.676 ; C13.1@104.054,109.417 cw(c104.876,109.657) 104.27,110.263 ; C13.1@104.297,109.488 cw(c105.345,109.794) 104.573,110.566 ; v1@105.344,120.305 cw(c104.755,119.716) 105.588,119.716 ; 105.588,119.961 cw(c106.073,119.961) v1@105.73,120.305 ; v1@105.588,120.498 105.588,111.023 105.131,110.566 104.573,110.566 ; C34.1@106.094,96.212 cw(c105.227,95.344) 106.453,95.344 cw(c107.679,95.344) C34.1@106.812,96.212 ; C34.1@106.453,96.698 106.453,94.622 103.962,92.131 103.962,91.415 107.107,88.27 ; BAT1.2@106.934,42.989 BAT1.2@107.226,42.697 ; v1@107.112,84.049 107.112,88.21 ; U1.16@109.627,70.219 111.557,68.289 111.557,66.753 C41.1@113.768,64.541 115.265,64.541 115.545,64.262 v1(115.545,63.475) ; 110.985,85.072 110.304,85.072 107.139,88.237 113.997,95.095 C44.1@113.997,95.733 ; 111.043,85.07 113.629,87.655 115.672,87.655 115.951,87.935 v1(117.577,87.935) 117.577,88.571 ; 112.684,65.625 ccw(c113.768,66.709) C41.1@113.768,65.176 ; 112.768,93.866 ccw(c111.029,95.606) C44.1@113.489,95.606 ; 112.991,65.319 cw(c112.34,64.668) C41.1@113.26,64.668 ; 113.118,65.192 ccw(c113.768,65.842) C41.1@113.768,64.922 ; 113.202,94.3 ccw(c111.896,95.606) C44.1@113.743,95.606 ; 113.636,94.734 ccw(c112.764,95.606) C44.1@113.997,95.606 ; C41.1@114.127,64.182 cw(c114.995,63.315) 114.995,64.541 cw(c114.995,65.768) C41.1@114.127,64.901 ; v1@115.352,63.668 ccw(c114.886,64.134) 115.545,64.134 ccw(c116.204,64.134) v1@115.738,63.668 ; LCD.26@115.646,134.544 cw(c115.646,132.949) 116.774,134.077 cw(c117.901,135.204) LCD.26@116.307,135.204 ; LCD.26@115.646,134.798 cw(c115.646,133.817) 116.34,134.51 cw(c117.034,135.204) LCD.26@116.053,135.204 ; LCD.26@115.646,135.204 LCD.27@118.186,132.664 119.761,131.089 119.761,129.769 120.65,128.88 120.65,126.187 118.999,124.536 123.469,124.536 124.765,125.832 ; U1.38@116.345,81.179 115.468,80.303 115.468,79.959 115.976,79.451 119.405,79.451 v1(119.456,79.502) 119.761,79.807 C42.1@122.045,79.807 ; C21.2@116.916,127.332 116.94,127.332 118.897,125.374 v1(118.897,120.396) ; C21.2@117.043,126.824 cw(c117.043,125.847) 117.734,126.538 ; C21.2@117.297,127.332 ccw(c118.16,127.332) C21.2@117.55,126.722 ; v1@117.384,87.742 ccw(c116.918,87.276) 116.918,87.935 ccw(c116.918,88.594) v1@117.384,88.128 ; v1@117.388,88.133 ccw(c116.971,88.571) 117.577,88.571 ; LCD.27@117.526,132.664 ccw(c115.931,132.664) 117.059,133.792 ccw(c118.186,134.919) LCD.27@118.186,133.325 ; C21.2@117.551,127.332 ccw(c119.027,127.332) 117.983,126.288 ; v1@117.577,88.139 cw(c118.57,88.139) C43.1@118.285,89.09 ; 117.577,88.48 cw(c118.467,88.48) C43.1@118.212,89.333 ; C43.1@117.742,89.141 cw(c117.311,88.964) 117.64,88.635 cw(c118.11,88.165) C43.1@118.168,88.827 ; v1@117.765,88.133 cw(c118.182,88.571) 117.577,88.571 ; LCD.27@117.78,132.664 ccw(c116.799,132.664) 117.492,133.358 ccw(c118.186,134.052) LCD.27@118.186,133.071 ; LCD.27@118.186,132.004 cw(c118.186,130.409) 119.314,131.537 cw(c120.441,132.664) LCD.27@118.847,132.664 ; LCD.27@118.186,132.258 cw(c118.186,131.277) 118.88,131.97 cw(c119.574,132.664) LCD.27@118.593,132.664 ; C43.1@118.339,89.333 117.577,88.571 ; 118.674,79.451 ccw(c118.674,80.284) v1@119.263,79.695 ; v1@118.704,120.589 ccw(c118.238,121.055) 118.897,121.055 ccw(c119.556,121.055) v1@119.09,120.589 ; 118.92,79.451 cw(c118.92,78.966) v1@119.263,79.309 ; 119.05,41.199 118.186,42.062 118.186,43.561 119.558,44.933 119.99,44.933 ; v1@119.47,79.489 cw(c120.238,78.72) 120.238,79.807 ; v1@119.649,79.309 cw(c120.851,78.107) 120.851,79.807 ; C42.1@121.686,79.448 ccw(c120.819,78.58) 120.819,79.807 ccw(c120.819,81.033) C42.1@121.686,80.166 ; C22.2@124.413,126.657 cw(c123.62,125.832) 124.765,125.832 ; C22.2@124.765,127.024 124.765,125.832 ; C22.2@125.117,126.657 ccw(c125.91,125.832) 124.765,125.832 ; C9.1@129.718,63.578 C9.1@129.718,63.705 ; v1@132.598,120.564 ccw(c132.132,121.03) 132.791,121.03 ccw(c133.45,121.03) v1@132.984,120.564 ; v1@132.598,136.688 cw(c132.132,136.222) 132.791,136.222 cw(c133.45,136.222) v1@132.984,136.688 ; v1(132.791,120.371) v1(132.791,136.881) ; C13.1@103.683,109.676 104.573,110.566
  Top Layer w1: C19.K@28.277,54.104 cw(c27.179,53.005) 28.733,53.005 ; C19.K@28.277,54.811 ccw(c27.179,55.91) 28.733,55.91 ; C17.K@28.379,44.198 cw(c27.525,43.344) 28.733,43.344 cw(c29.94,43.344) C17.K@29.086,44.198 ; C17.K@28.379,44.905 ccw(c27.525,45.759) 28.733,45.759 ccw(c29.94,45.759) C17.K@29.086,44.905 ; 28.616,69.205 cw(c29.54,68.281) JTAG.4@29.54,69.588 ; 30.404,109.754 30.404,111.669 30.887,112.153 30.887,113.844 35.66,118.616 C5.1@36.144,118.616 36.144,123.774 40.742,128.372 C3.2@42.496,128.372 48.82,128.372 C2.1@48.997,128.548 ; 31.337,33.102 ccw(c33.572,35.337) P11.1@33.597,32.177 ; P11.1@33.604,30.836 31.09,33.35 31.09,37.414 28.733,39.771 C17.K@28.733,44.552 28.733,58.12 31.09,60.477 v1(31.09,60.731) 31.09,61.951 27.407,65.634 27.407,67.996 29.54,70.129 JTAG.6@29.54,72.415 JTAG.8@29.54,74.955 29.54,77.267 JTAG.10@29.54,77.495 JTAG.12@29.54,80.035 JTAG.14@29.54,82.575 JTAG.16@29.54,85.115 JTAG.18@29.54,87.655 JTAG.20@29.54,90.195 29.54,97.13 31.852,99.441 C16.K@39.472,99.441 ; 35.177,118.133 cw(c36.017,117.293) C5.1@36.017,118.481 ; 37.312,107.315 39.472,105.156 C16.K@39.472,99.441 ; 43.011,99.441 cw(c43.011,97.481) C15.K@44.397,98.867 ; C20.1@43.028,58.039 C20.1@43.028,57.683 ; C20.1@43.155,58.174 ccw(c43.155,59.052) C20.1@43.775,58.431 ; 43.956,86.879 U5.1@46.688,86.879 ; 44.128,58.784 ccw(c43.172,59.741) v1@44.525,59.741 ; v1(44.425,59.741) 44.425,59.08 C20.1@43.028,57.683 ; C15.K@44.778,99.507 ccw(c42.932,101.353) 45.542,101.353 ; C15.K@44.907,99.187 47.954,99.187 C14.1@49.046,98.095 ; C15.K@44.99,99.627 ccw(c44.818,100.33) 45.542,100.33 ; C15.K@45.418,98.867 cw(c46.19,98.095) 46.19,99.187 cw(c46.19,100.279) C15.K@45.418,99.507 ; C15.K@45.467,99.448 cw(c46.028,99.845) 45.542,100.33 ; C4.1@45.542,108.358 45.542,100.33 ; DS2.K@45.594,134.669 48.997,131.267 ; U8.1@47.295,124.257 49.073,124.257 49.352,124.536 49.352,128.192 C2.1@48.997,128.548 ; 48.118,128.372 ccw(c48.118,129.299) C2.1@48.774,128.643 ; C2.1@49.028,128.452 cw(c48.246,127.67) 49.352,127.67 ; U8.1@49.167,124.141 ccw(c48.719,124.588) 49.352,124.588 ; LM2.5@53.066,73.353 53.066,70.174 54.483,68.758 56.292,68.758 ; LM2.3@53.365,58.115 cw(c55.858,55.623) LM2.3@55.858,59.148 ; LM2.3@53.43,57.164 ccw(c51.633,58.96) LM2.3@53.768,60.338 ; LM2.3@54.034,57.768 ccw(c52.426,59.375) LM2.3@54.336,60.609 ; LM2.3@54.744,57.512 54.838,57.607 v2(55.016,57.607) ; Q8.3@56.109,45.136 56.337,45.364 v2(56.337,47.854) ; 56.445,71.425 LM2.3@56.445,73.353 ; LM2.3@56.445,74.58 56.464,74.6 56.464,73.359 LM2.3@56.47,73.353 56.47,64.694 56.445,64.668 LM2.3@56.445,61.542 57.232,62.329 65.841,62.329 C30.2@67.54,60.63 ; C1.1@56.769,128.548 54.05,131.267 48.997,131.267 ; LM2.3@56.887,58.06 55.606,59.34 50.724,54.458 C18.1@43.053,54.458 43.028,54.483 C20.1@43.028,57.683 ; Q7.1@62.342,35.782 64.091,35.782 v2(64.262,35.611) ; v2(62.611,46.279) 62.948,45.942 Q5.1@62.948,44.892 ; C29.K@67.185,75.692 ccw(c66.331,76.545) 67.539,76.545 ccw(c68.746,76.545) C29.K@67.892,75.692 ; C29.K@67.539,74.188 67.539,81.141 D12.A@68.313,81.915 ; 67.539,77.633 cw(c72.595,77.633) D12.A@69.02,81.208 ; 67.539,80.047 cw(c70.181,80.047) D12.A@68.313,81.915 ; D12.A@67.605,82.623 ccw(c65.898,84.33) 68.313,84.33 ccw(c70.727,84.33) D12.A@69.02,82.623 ; C31.K@68.313,85.6 cw(c68.985,85.6) C31.K@68.509,86.075 ; C31.K@68.504,87.629 ccw(c68.504,88.3) C31.K@68.978,87.825 ; C31.K@68.504,88.629 ccw(c68.504,91.714) 70.685,89.532 ; R6.2@69.925,115.697 71.298,115.697 v1(71.653,115.341) ; v2(69.926,35.56) 69.952,35.535 R44.1@73.103,35.535 ; v1(70.715,110.742) R5.2@70.715,108.915 71.249,109.449 v1(75.159,109.449) 76.532,109.449 76.606,109.374 76.554,109.374 C12.1@77.089,108.839 ; R5.2@70.811,108.947 cw(c72.022,107.735) 72.022,109.449 ; 71.036,115.697 cw(c71.036,114.724) v1@71.724,115.412 ; C32.2@71.271,96.037 71.271,90.118 C31.K@68.504,87.351 68.313,87.159 D12.A@68.313,81.915 ; v2@72.695,28.473 71.169,29.999 R47.1@70.333,29.999 73.076,32.742 R44.1@73.076,35.23 ; 75.938,109.449 cw(c75.938,108.169) C12.1@76.843,109.074 ; v1@82.474,30.353 U7.4@82.474,31.826 U7.3@82.474,33.096 U7.2@82.474,34.366 U7.1@82.474,35.636 ; C45.1@91.313,40.464 v1@91.313,46.634 ; BAT1.2@106.695,43.228 ccw(c105.415,44.508) 107.226,44.508 ccw(c109.036,44.508) BAT1.2@107.756,43.228 ; v1@107.005,47.148 ccw(c106.471,47.681) 107.226,47.681 ; v1@107.005,47.289 cw(c106.471,46.756) 107.226,46.756 ; v1@107.226,53.455 BAT1.2@107.226,42.697 109.474,42.697 v1(111.176,44.399) ; BAT1.2@108.976,43.447 ccw(c108.976,46.461) v1@111.107,44.33 ; LCD.22@110.566,135.204 110.744,135.382 110.744,136.017 111.684,136.957 113.894,136.957 LCD.26@115.646,135.204 ; LCD.22@110.854,135.204 cw(c113.08,135.204) 111.506,136.779 ; v1(119.05,39.446) 119.05,41.199 ; 119.99,44.933 120.701,44.933 121.31,45.542 124.079,45.542 128.778,50.241 C23.1@128.778,52.808 128.778,57.71 C10.1@126.314,60.174 128.195,60.174 129.718,61.697 C9.1@129.718,63.578 ; C11.1@132.639,37.594 132.639,35.23 v1(132.74,35.128) ; v1(142.443,35.687) 142.443,34.239 KEY0.1@144.678,32.004 ; R33.2@142.494,104.9 142.494,106.985 v1(143.51,108.001) ; v1@149.327,107.605 ccw(c151.647,107.605) R16.2@150.006,105.964 ; v1(149.327,107.975) 149.327,106.58 R16.2@150.038,105.869 ; KEY1.1@162.431,31.953 163.119,31.953 166.878,35.712 166.878,40.208 169.926,40.208 RESET.2@169.977,40.259 RESET.2@176.477,40.259 ; 169.16,40.208 ccw(c169.16,41.075) RESET.2@169.774,40.462 ; JUMP1.2@169.85,137.008 170.815,137.008 171.829,138.021 ; JUMP1.2@169.861,137.257 ccw(c169.978,139.872) 171.829,138.021 ; U6.1@175.693,130.834 ccw(c174.912,131.616) 176.016,131.616 ; U6.1@175.87,130.658 176.016,130.804 176.016,132.227 176.98,133.19 176.98,136.456 175.415,138.021 171.829,138.021 ; C16.K@39.472,99.441 44.653,99.441 45.542,100.33 ; C2.1@48.997,128.548 48.997,131.267
  Bottom Layer w0.254: 36.855,86.411 37.465,86.411 37.973,85.903 42.748,85.903 43.358,86.512 43.358,86.868 43.561,87.071 v1(43.561,87.274) v1@43.51,87.274 ; v2@72.365,28.473 72.466,28.372 v2(72.746,28.372) ; v1@74.94,112.659 cw(c74.474,112.193) 75.133,112.193 cw(c75.792,112.193) v1@75.326,112.659 ; v1@74.955,66.021 cw(c74.955,65.362) 75.421,65.828 cw(c75.887,66.294) v1@75.228,66.294 ; v1(74.955,66.294) 79.578,61.671 v1(80.772,61.671) 81.636,60.808 87.452,60.808 v1(87.884,60.376) ; v1@74.966,109.256 cw(c74.5,108.79) 75.159,108.79 cw(c75.818,108.79) v1@75.352,109.256 ; v1@74.966,109.642 ccw(c74.561,110.046) 75.133,110.046 ; v1@75.042,103.012 ccw(c74.76,103.294) 75.159,103.294 ; v1@75.133,109.474 v1(75.133,112.852) ; 75.133,110.169 ccw(c75.879,110.169) v1@75.352,109.642 ; v1@75.159,102.819 v1(75.159,109.449) ; 75.159,103.662 ccw(c76.078,103.662) v1@75.428,103.012 ; v1@80.569,121.037 cw(c80.569,120.378) 81.035,120.844 cw(c81.501,121.31) v1@80.842,121.31 ; v1(80.569,121.31) 81.407,120.472 96.545,120.472 96.723,120.294 99.162,120.294 99.365,120.498 v1(105.537,120.498) v1@118.796,120.498 ; v1@80.579,61.478 ccw(c80.113,61.012) 80.113,61.671 ccw(c80.113,62.33) v1@80.579,61.864 ; v1@80.772,61.398 cw(c80.772,60.739) 81.238,61.205 cw(c81.704,61.671) v1@81.045,61.671 ; v1(80.797,82.601) 81.204,82.601 81.661,82.144 v1(86.893,82.144) ; v1@80.799,82.582 cw(c80.863,81.723) 81.473,82.332 ; v1@86.7,81.951 ccw(c86.234,81.485) 86.234,82.144 ccw(c86.234,82.803) v1@86.7,82.337 ; v1@87.884,60.103 cw(c87.884,58.831) 88.784,59.73 ; v1@87.884,60.357 cw(c87.884,59.698) 88.35,60.164 ; v1@88.138,60.376 90.602,57.912 v1(93.853,57.912) 94.513,57.912 95.86,56.566 95.86,51.511 100.152,47.219 ; v1@93.66,57.719 ccw(c93.194,57.253) 93.194,57.912 ccw(c93.194,58.571) v1@93.66,58.105 ; v1@94.046,57.719 cw(c94.512,57.253) 94.512,57.912 cw(c94.512,58.571) v1@94.046,58.105 ; v1(94.615,83.922) 94.615,82.956 95.123,82.448 96.495,82.448 97.866,83.82 ; 98.755,87.554 98.552,87.351 98.552,84.506 97.866,83.82 ; 98.755,87.606 cw(c99.414,87.606) v1@98.948,88.072 ; v1@105.344,120.305 ccw(c104.878,119.839) 104.878,120.498 ccw(c104.878,121.157) v1@105.344,120.691 ; v1@105.73,120.305 cw(c106.196,119.839) 106.196,120.498 cw(c106.196,121.157) v1@105.73,120.691 ; v1@106.782,83.82 97.866,83.82 ; v1@106.959,53.797 115.545,62.382 v1(115.545,63.475) ; v1@107.055,53.645 cw(c107.652,53.645) 107.23,54.067 ; v1@107.309,53.645 cw(c108.52,53.645) 107.663,54.501 ; v1@115.352,63.282 cw(c114.886,62.816) 115.545,62.816 cw(c116.204,62.816) v1@115.738,63.282 ; v1@117.384,87.742 cw(c116.918,87.276) 117.577,87.276 cw(c118.236,87.276) v1@117.77,87.742 ; v1(117.577,87.935) 117.577,85.039 119.456,83.16 v1(119.456,79.502) ; 117.993,120.498 cw(c117.993,119.492) v1@118.704,120.203 ; 118.484,120.498 ccw(c118.484,120.81) v1@118.704,120.589 ; v1(118.897,120.396) 137.49,120.396 141.028,116.858 ; v1@119.09,120.203 cw(c119.556,119.737) 119.556,120.396 cw(c119.556,121.055) v1@119.09,120.589 ; v1@119.263,79.695 ccw(c118.797,80.161) 119.456,80.161 ccw(c120.115,80.161) v1@119.649,79.695 ; 132.071,120.396 cw(c132.071,119.65) v1@132.598,120.178 ; 132.193,120.396 ccw(c132.193,120.968) v1@132.598,120.564 ; v1@132.984,120.178 cw(c133.512,119.65) 133.512,120.396 ; v1@132.984,120.564 ccw(c133.389,120.968) 133.389,120.396
  Bottom Layer w1: JTAG.20@29.54,90.195 29.54,91.034 31.191,92.685 34.595,92.685 35.484,91.796 35.484,87.224 36.246,86.462 36.805,86.462 36.855,86.411 ; JTAG.20@29.828,90.195 cw(c32.545,90.195) 30.624,92.117 ; v1(31.09,60.731) 43.434,60.731 v1(44.425,59.741) ; v2(56.337,47.854) 56.337,58.344 56.388,58.395 ; v2@56.591,47.879 60.071,47.879 61.671,46.279 v2(62.611,46.279) 64.262,44.628 v2(64.262,35.611) ; v2@64.262,35.56 v2(69.926,35.56) ; D12.A@68.313,81.915 71.12,81.915 72.949,83.744 v1(76.962,83.744) ; D12.A@69.02,81.208 cw(c70.727,79.501) 70.727,81.915 cw(c70.727,84.33) D12.A@69.02,82.623 ; v1(70.715,110.742) 70.715,112.879 71.171,113.335 71.171,114.859 v1(71.653,115.341) ; 71.171,114.418 cw(c72.577,114.418) v1@71.583,115.412 ; v2(72.746,28.372) 74.092,28.372 75.997,30.277 82.245,30.277 v1(82.321,30.302) v1(86.487,30.302) ; v1@75.235,102.743 77.47,100.508 86.436,100.508 v1(87.173,99.771) ; v1@91.292,46.732 cw(c91.897,46.598) 91.897,47.219 ; v1@91.318,46.781 cw(c92.374,45.726) 92.374,47.219 ; v1(91.389,46.711) 91.897,47.219 ; v1(106.934,47.219) 100.152,47.219 91.897,47.219 ; v1(111.176,44.399) 113.97,44.399 123.241,35.128 v1(132.74,35.128) 133.198,35.585 v1@142.342,35.585 ; v1@132.67,35.199 cw(c133.603,34.266) 133.603,35.585 ; v1(132.791,136.881) 169.723,136.881 JUMP1.2@169.85,137.008 ; 141.028,116.858 143.51,114.376 v1(143.51,108.001) v1@149.301,108.001 ; KEY0.1@144.678,32.004 KEY0.1@151.178,32.004 KEY1.1@162.38,32.004 ; 155.114,32.004 cw(c155.114,31.137) KEY1.1@155.727,31.75 ; KEY1.1@156.134,31.75 cw(c156.747,31.137) 156.747,32.004 ; 161.614,32.004 cw(c161.614,31.137) KEY1.1@162.227,31.75 ; 168.94,136.881 ccw(c168.94,137.918) JUMP1.2@169.673,137.184
  other v1: 107.036,53.645 106.832,83.769 75.235,102.819
  other v2: 47.498,54.204 47.371,55.728 51.689,56.794 61.417,56.921 56.667,57.582 58.344,57.709 51.638,58.445 61.392,59.106 47.473,59.131 61.443,60.681 51.791,60.96 51.867,65.227 61.341,65.38
IIC_SCL: R41.1 U1.136 U7.6 | length 48.1
  Top Layer w0.254: U7.6@88.174,33.096 93.524,33.096 R41.1@94.386,33.958 ; U7.6@88.817,32.961 cw(c89.142,32.636) 89.142,33.096 cw(c89.142,33.556) U7.6@88.817,33.231 ; 93.588,33.16 ccw(c93.097,33.651) R41.1@93.768,33.828 ; 93.609,33.181 cw(c94.259,32.53) R41.1@94.259,33.45 ; R41.1@94.027,34.317 ccw(c93.16,35.185) 94.386,35.185 ccw(c95.613,35.185) R41.1@94.746,34.317 ; R41.1@94.412,33.984 R41.1@94.386,33.958 ; U1.136@97.96,67.744 96.85,66.634 96.85,65.024 96.164,64.338 96.164,63.322 94.412,61.57 93.472,61.57 92.507,60.604 92.507,54.102 94.386,52.222 R41.1@94.386,33.958
IIC_SDA: R42.1 U1.137 U7.5 | length 69.4
  Top Layer w0.254: U7.5@88.174,31.826 93.801,31.826 R42.1@94.386,31.24 94.386,29.82 v1(94.209,29.642) ; U7.5@88.817,31.691 cw(c89.142,31.366) 89.142,31.826 cw(c89.142,32.286) U7.5@88.817,31.961 ; 91.619,31.826 cw(c91.619,28.6) R42.1@93.9,30.881 ; 92.232,31.826 cw(c92.232,29.213) R42.1@94.08,31.061 ; 92.845,31.826 cw(c92.845,29.826) R42.1@94.259,31.24 ; 93.458,31.826 cw(c93.458,30.439) R42.1@94.439,31.42 ; v1@94.016,29.835 ccw(c93.12,30.73) R42.1@94.386,30.73 ; R42.1@94.027,30.881 cw(c93.16,30.014) 94.386,30.014 cw(c95.613,30.014) R42.1@94.746,30.881 ; v1@94.195,29.655 ccw(c93.733,30.117) 94.386,30.117 ; v1@96.505,62.017 ccw(c95.855,62.667) 96.774,62.667 ; v1@96.774,62.027 96.774,64.008 97.485,64.719 97.485,66.562 U1.137@98.313,67.39 ; 96.774,62.299 ccw(c97.173,62.299) v1@96.891,62.017 ; v1@97.013,52.41 cw(c96.547,51.944) 97.206,51.944 cw(c97.865,51.944) v1@97.399,52.41 ; v1(97.206,52.603) 97.206,36.881 98.755,35.331 v1(98.755,30.175) ; v1@98.562,30.368 ccw(c98.096,30.834) 98.755,30.834 ccw(c99.414,30.834) v1@98.948,30.368
  Bottom Layer w0.254: v1(94.209,29.642) 94.64,29.21 97.79,29.21 v1(98.755,30.175) ; v1@96.505,61.631 cw(c96.039,61.165) 96.698,61.165 cw(c97.357,61.165) v1@96.891,61.631 ; v1(96.698,61.824) 96.698,60.604 97.206,60.096 v1(97.206,52.603) ; v1@97.013,52.796 ccw(c96.547,53.262) 97.206,53.262 ccw(c97.865,53.262) v1@97.399,52.796 ; v1@98.482,30.175 cw(c97.823,30.175) 98.289,29.709 cw(c98.755,29.243) v1@98.755,29.902